# Altium PCB CareBoard_SMD.PcbDoc
Units mil, origin at the board's own origin, x right, y up, seen from the top; angles counter-clockwise.
Board outline 6840 x 2601.5 mil, 2 copper layers (Top Layer, Bottom Layer); 86 components, 76 nets, 332 pads, 108 vias.
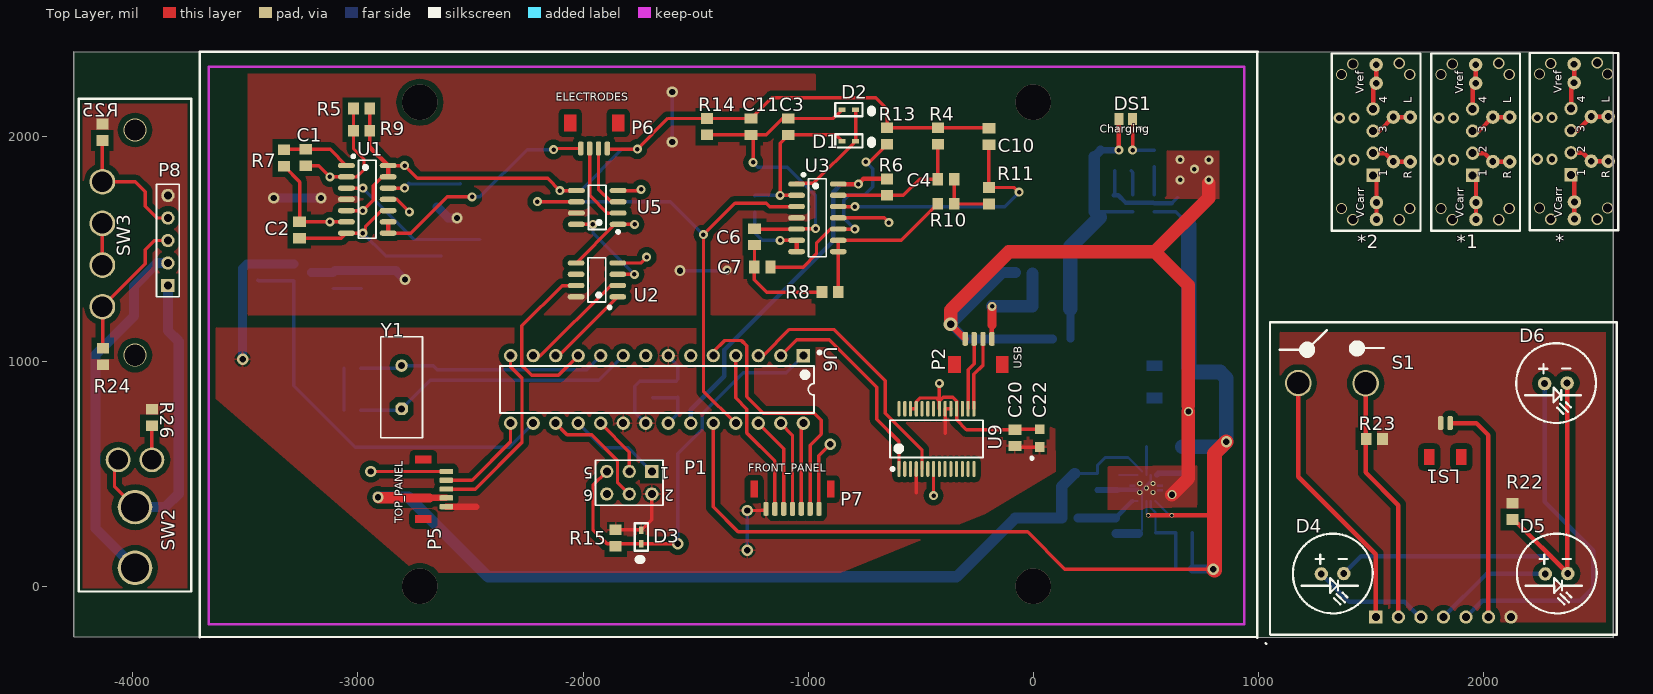
[diagram p0: Top Layer view]
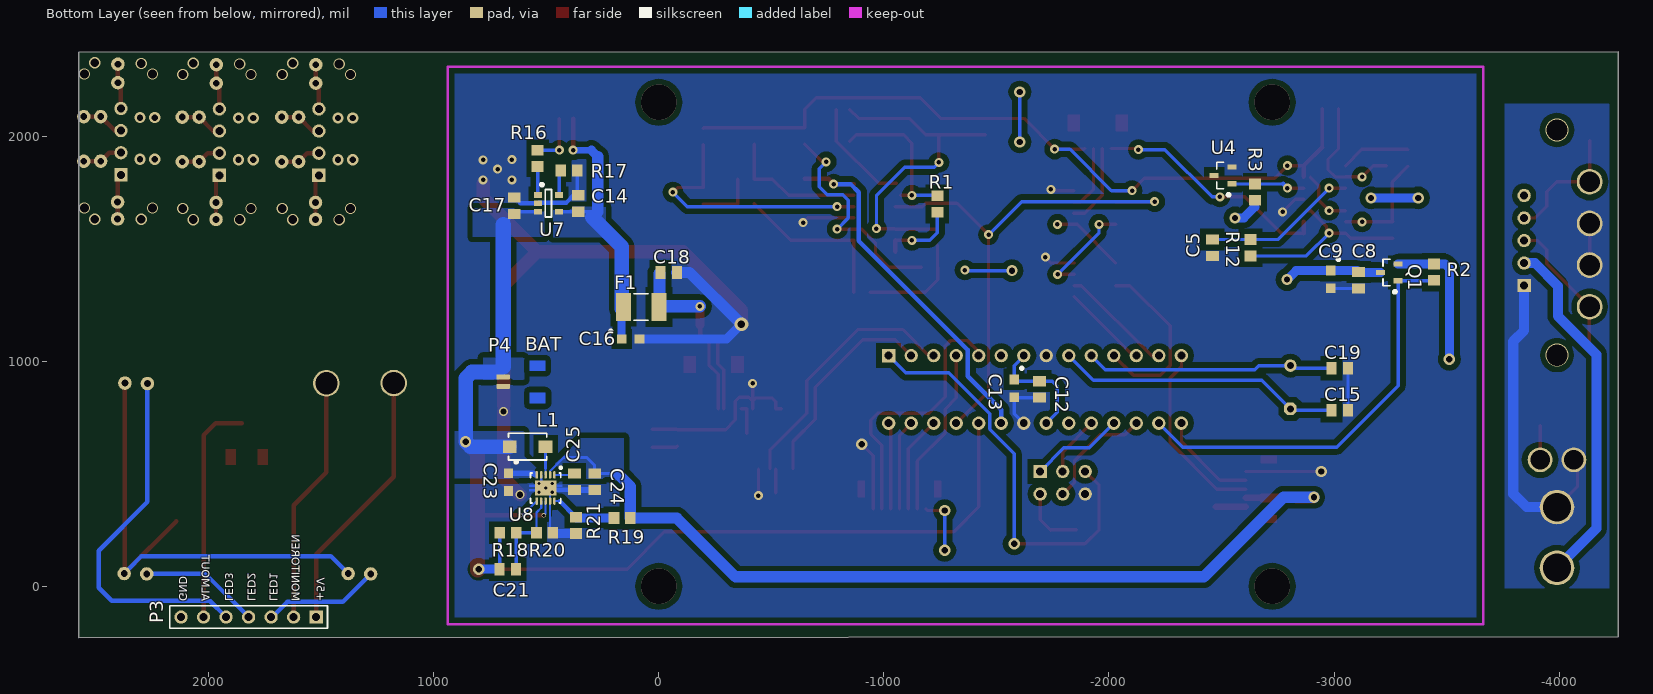
[diagram p1: Bottom Layer view, seen from below]
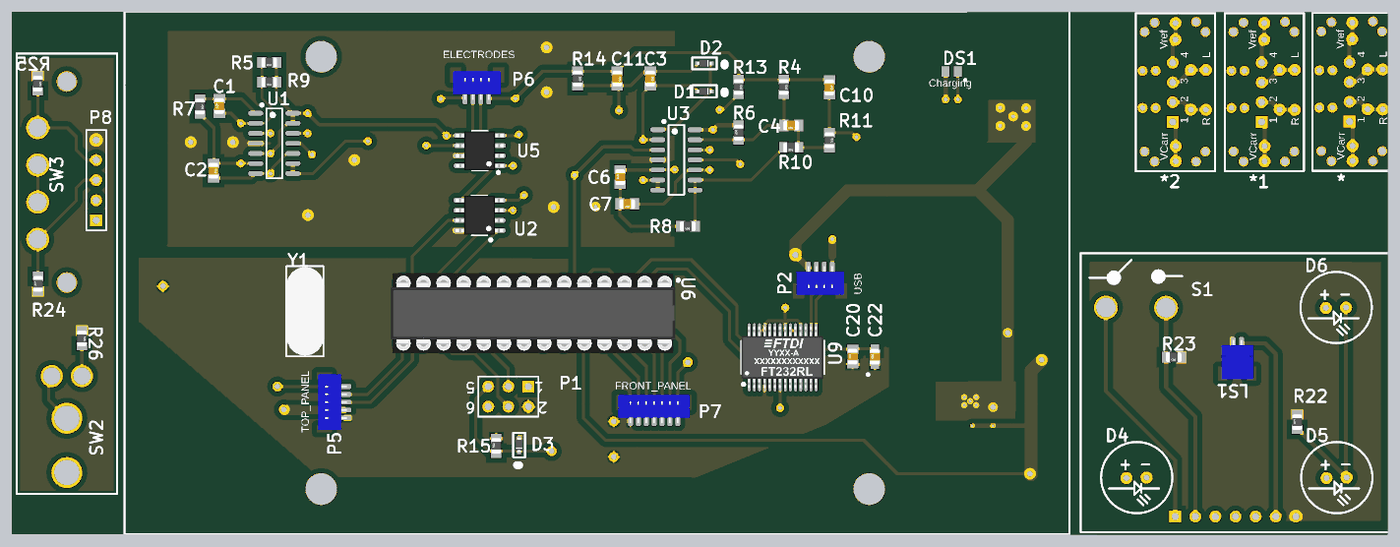
[diagram p2: 3D render of the assembled board from above, using the file's embedded part models]
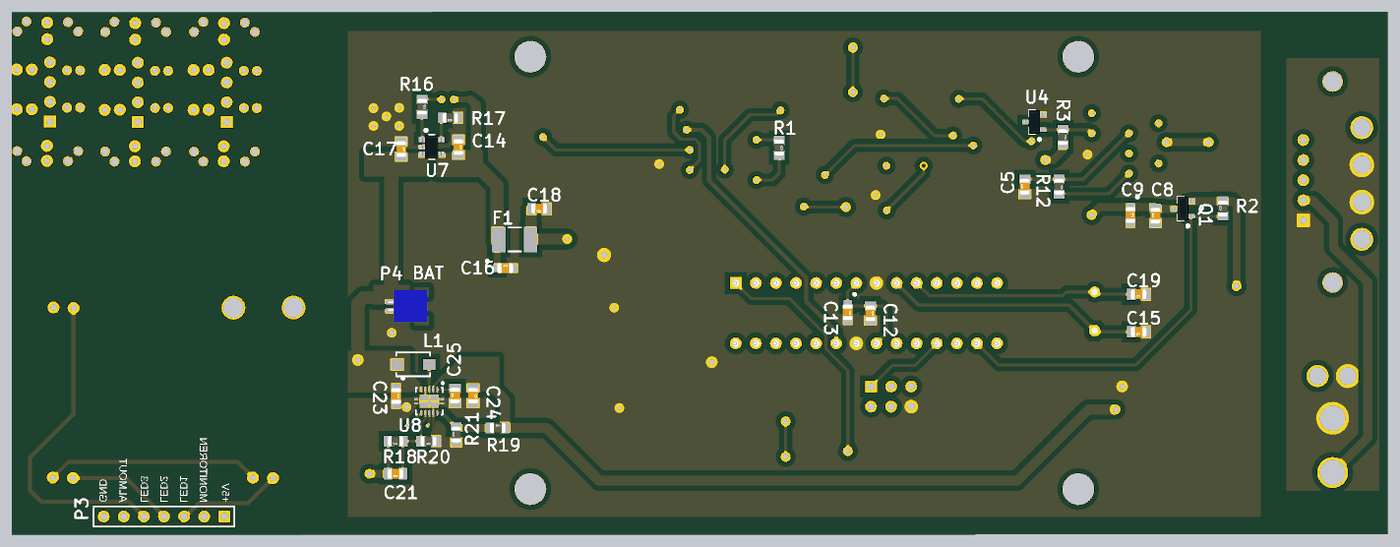
[diagram p3: 3D render of the assembled board from below, using the file's embedded part models]

## Layer stack, top to bottom
Top Layer: signal copper 1.4
Dielectric: dielectric 12.6, FR-4, Dk 4.8
Bottom Layer: signal copper 1.4

## Board outline
-4262.5,-225 2577.5,-227.5 2577.5,2371.5 -4262.5,2374

## Design rules (kind name [scope] priority, off if disabled: settings)
Clearance "Polygon Clearance" [All vs InPolygon] p1: gap=25 // Distance between polygons and different nets
Clearance [All] p2: gap=5 // Trace/Space
ComponentClearance [All] p1: gap=20 collisioncheckmode=3 verticalgap=20 showdistances=TRUE
FanoutControl Fanout_Default [All] p5: bgadir=Out bgaviamode=Centered fanoutstyle=Auto fanoutdirection=OutOnly viagrid=1 // Fanout_Default (Default Rule)
HoleSize [All] p1: absolutevalues=TRUE maxlimit=160 minlimit=15 maxpercent=80.000 minpercent=20.000
MinimumAnnularRing [All] p1: minimumring=8
MinimumSolderMaskSliver [All] p1: minsoldermaskwidth=1
PolygonConnect PolygonConnect_1 [All vs IsNamedPolygon('+5V')] p1: connectstyle=Relief reliefconductorwidth=10 reliefentries=4 polygonreliefangle="90 Angle" airgapwidth=10
PolygonConnect [All] p2: connectstyle=Direct reliefconductorwidth=10 reliefentries=4 polygonreliefangle="90 Angle" airgapwidth=10
RoutingVias [All] p1: holewidth=20 width=40 viastyle="Through Hole" minholewidth=15 minwidth=35 maxholewidth=30 maxwidth=50
SilkToSilkClearance [All] p1: silktosilkclearance=1
SilkToSolderMaskClearance SilkscreenOverComponentPads [IsPad] p1: minsilkscreentomaskgap=1 clearancetoexposedcopper=TRUE
SolderMaskExpansion [All] p1: expansion=4
Width [All] p1: maxlimit=250 minlimit=7 preferedwidth=15
22 further rules are at their usual default settings.

## Classes and differential pairs
component class CaRe_Schematic_SMD_FRONT_PANEL: D4 D5 D6 LS1 P3 R22 R23 S1
component class CaRe_Schematic_SMD_TOP_PANEL: P8 R24 R25 R26 SW2 SW3

## Components (designator, comment, footprint, x,y, rotation, side; value= is the part's Value field where it differs from the comment)
* "GARMENT_CONNECTOR" GARMENT_DIN 2599,1582.1 r90 top
*1 "GARMENT_CONNECTOR" GARMENT_DIN 2161.7,1580 r90 top (schematic designator *)
*2 "GARMENT_CONNECTOR" GARMENT_DIN 1719.7,1580 r90 top (schematic designator *)
C1 "SockCap" CAP0805 -3231.31,1905 r90 top
C2 "SockCap" CAP0805 -3260,1583 r270 top
C3 "SockCap" CAP0805 -1088,2041.9 r270 top
C4 "SockCap" CAP0805 -387.69,1808 r180 top
C5 "SockCap" CAP0805 -2459,1504 r90 bottom
C6 "SockCap" CAP0805 -1238,1552 r90 top
C7 "SockCap" CAP0805 -1203.21,1418 r180 top
C8 "SockCap" CAP0805 -3108.6,1359.68 r90 bottom
C9 "SockCapPol" 0805TANTCAP -2985,1363.13 r270 bottom
C10 "SockCap" CAP0805 -197,1998 r270 top
C11 "SockCap" CAP0805 -1253,2041.9 r270 top
C12 "SockCap" CAP0805 -1691,874.76 r270 bottom
C13 "SockCapPol" 0805TANTCAP -1578.51,879.68 r270 bottom
C14 "4.7uF" CAP0805 357.85,1700.42 r270 bottom
C15 "SockCap" CAP0805 -3025,782.23 r0 bottom
C16 "10uF" 0805TANTCAP 125,1099 r180 bottom
C17 "4.7uF" CAP0805 642,1691 r270 bottom
C18 "100nF" CAP0805 -44,1394.13 r0 bottom
C19 "SockCap" CAP0805 -3025,968.6 r0 bottom
C20 "SockCap" CAP0805 -81.69,659.31 r90 top
C21 "100nF" CAP0805 670.58,76 r0 bottom
C22 "SockCapPol" 0805TANTCAP 28.31,658 r90 top
C23 "10uF" 0805TANTCAP 667.58,463 r270 bottom
C24 "22uF" CAP0805 284.58,464.58 r270 bottom
C25 "100nF" CAP0805 374.58,465 r90 bottom
D1 "BAT42W" SOD-523 -819,1977.9 r180 top
D2 "BAT42W" SOD-523 -819,2116.9 r180 top
D3 "BAT42W" SOD-523 -1741,219 r90 top
D4 "STATUS" 10MMLED 1279.5,54.92 r0 top
D5 "CARDIAC" 10MMLED 2274.5,54.92 r0 top
D6 "RESPIRATORY" 10MMLED 2271.5,900.92 r0 top
DS1 "CHIPLED_RED" CHIP_LED0805 411,2076.59 r180 top
F1 "MF-MSMF050-1" "MF-MSMF050 FOOTPRINT" 78,1241 r0 bottom
L1 "4.7uH" INDP4330X10N 582.58,620 r180 bottom
LS1 "ALARM" "JST-2 PIN SMD CONNECTOR" 1910,741.42 r180 top
P1 "ICSP" HDR2X3 -1694.3,510 r180 top
P2 "USB" "JST 4-PIN SMD" -124.89,1108.17 r180 top
P3 "Front Panel Connections" HDR1X7 1522,-136.58 r0 bottom
P4 "BAT" "JST-2 PIN SMD CONNECTOR" 707,988 r270 bottom
P5 "TOP_PANEL" "JST 5 PIN SMD" -2597,294 r90 top
P6 "ELECTRODES" "JST 4-PIN SMD" -2069,1936 r0 top
P7 "FRONT_PANEL" "JST-SH 7-PIN VERTICAL SMD" -1247,319 r0 top
P8 "Header 5" HDR1X5 -3844,1336 r90 top
Q1 "BSP304" SOT23_L -3245,1394.13 r0 bottom
R1 "SockRes" RES0805 -1237.69,1697.9 r270 bottom
R2 "SockRes" RES0805 -3444,1395.5 r90 bottom
R3 "SockRes" RES0805 -2648.31,1751 r270 bottom
R4 "SockRes" RES0805 -423.98,2000 r270 top
R5 "SockRes" RES0805 -2983.31,2121.71 r180 top
R6 "SockRes" RES0805 -649,1773 r90 top
R7 "SockRes" RES0805 -3328,1902.46 r270 top
R8 "SockRes" RES0805 -902,1307 r180 top
R9 "SockRes" RES0805 -2983.31,2023.69 r180 top
R10 "SockRes" RES0805 -387.69,1699.42 r180 top
R11 "SockRes" RES0805 -197,1735 r270 top
R12 "SockRes" RES0805 -2629,1504 r270 bottom
R13 "SockRes" RES0805 -649,2000 r270 top
R14 "SockRes" RES0805 -1450,2041.9 r270 top
R15 "1K" RES0805 -1855,215 r90 top
R16 "330" RES0805 538,1901.22 r270 bottom
R17 "2K" RES0805 398.27,1846.32 r0 bottom
R18 "2M" RES0805 669.58,238 r0 bottom
R19 "2M" RES0805 162.58,304 r180 bottom
R20 "220K" RES0805 506.58,238 r0 bottom
R21 "220K" RES0805 368.58,271 r90 bottom
R22 "Resistor" RES0805 2129,333.42 r90 top
R23 "Resistor" RES0805 1515,655.42 r180 top
R24 "Resistor" RES0805 -4133,1021 r90 top
R25 "Resistor" RES0805 -4135,2017 r270 top
R26 "Resistor" RES0805 -3915,750 r270 top
S1 "ENABLE" SPST 1177.5,902.92 r0 top
SW2 "On/Off Rocker Swith" POWER_SWITCH -3990,82 r90 top
SW3 "Slider Switch" SLIDER -3990,1027 r90 top
U1 "TLV274IN" TI-D14_L -2958.31,1719 r0 top
U2 "XXXXX" SOIC-8 -1938,1361 r180 top
U3 "TLV274IN" TI-D14_L -958.69,1636.9 r0 top
U4 "LM4040" SOT23_L -2506.31,1825 r0 bottom
U5 "LT1920" LT-S8-8_L(LT1920) -1936.69,1683 r180 top
U6 "ATmega328P-PU" 28P3 -1671.32,874.76 r270 top
U7 "MCP73831T-2ADI/OT" SOT-23-OT5_L 490,1701.32 r180 bottom
U8 "TPS61200DRCT" DRC10-2400X1650TP 502.58,437 r270 bottom
U9 "FT232RL-Reel" SSOP-28_L(FTDI) -430,655 r90 top
Y1 "ECS-10-3-1" HC-49U -2806,884.23 r90 top

## Footprints (in the part's own frame and the unit in brackets; to place one, negate y for a bottom-side part, rotate by r counter-clockwise, add the part's x,y. Pads: shape width x height; smd on the part's side, far side on the other; paste and mask are expansions set on the pad)
10MMLED [mil]
  round 60 hole 30: 1(0,0) 2(100,2)
  silkscreen extent -126,-175 228,179
28P3 [mm] "DIP, 28-Leads, Row Spacing 7.62mm, Pitch 2.54mm, Body 34.67x7.3mm"
  rect 1.5x1.5 hole 0.9: 1(-3.81,16.51)
  round 1.5 hole 0.9: 2(-3.81,13.97) 3(-3.81,11.43) 4(-3.81,8.89) 5(-3.81,6.35) 6(-3.81,3.81) 7(-3.81,1.27) 8(-3.81,-1.27) 9(-3.81,-3.81) 10(-3.81,-6.35) 11(-3.81,-8.89) 12(-3.81,-11.43) 13(-3.81,-13.97) 14(-3.81,-16.51) 15(3.81,-16.51) 16(3.81,-13.97) 17(3.81,-11.43) 18(3.81,-8.89) 19(3.81,-6.35) 20(3.81,-3.81) 21(3.81,-1.27) 22(3.81,1.27) 23(3.81,3.81) 24(3.81,6.35) 25(3.81,8.89) 26(3.81,11.43) 27(3.81,13.97) 28(3.81,16.51)
  silkscreen extent -4.29,-17.7 2.65,18.46, body extent -5.05,-18 5.05,18, height 8.89
0805TANTCAP [mm] "0805 TANTALUM CAPACITOR MOLDED"
  rect 1.1x1.05 smd: 1(-1,0) 2(1,0)
  silkscreen extent -2.36,0.76 -2.16,0.96, body extent -1,-0.62 1,0.63, height 0.78
CAP0805 [mm] "Chip Capacitor 0805 Package"
  rect 1.15x1.45 smd: 1(-0.925,0) 2(0.925,0)
  body extent -1,-0.62 1,0.63, height 0.78
CHIP_LED0805 [mm] "LED 0805"
  rect 1x1.35 smd: 1(-0.775,0) 2(0.775,0)
  silkscreen extent -1.75,1.02 -1.65,1.12, body extent -1.07,-0.7 1.07,0.7, height 1.1
DRC10-2400X1650TP [mm] "SON, 10-Leads, Body 3x3mm, Pitch 0.5mm, Thermal Pad 2.4x1.65mm, TI Recommended"
  oval 0.85x0.28 smd paste-0.025 mask+0.07: 1(-1.475,1) 2(-1.475,0.5) 3(-1.475,0) 4(-1.475,-0.5) 5(-1.475,-1) 6(1.475,-1) 7(1.475,-0.5) 8(1.475,0) 9(1.475,0.5) 10(1.475,1)
  rect 1.65x2.4 smd paste-0.825 mask+0.07: 11(0,0)
  Top Layer region: -0.39,-1.2 -0.11,-1.2 -0.11,-1.9 -0.39,-1.9
  Top Layer region: 0.39,-1.9 0.11,-1.9 0.11,-1.2 0.39,-1.2
  Top Layer region: 0.39,1.2 0.11,1.2 0.11,1.9 0.39,1.9
  Top Layer region: -0.39,1.9 -0.11,1.9 -0.11,1.2 -0.39,1.2
  silkscreen extent -2.34,-1.7 1.7,1.75, body extent -1.55,-1.55 1.55,1.55, height 1
GARMENT_DIN [mil]
  rect 59.06x59.06 hole 35.43: 1(245.93,210)
  round 59.06 hole 35.43: 2(344.13,210) 3(442.33,210) 4(540.53,210)
  round 60 hole 30: 6(50,195) 6(306.03,45) 6(504.37,45) 6(737.4,196.5) 7(125,195) 7(306.67,120) 7(504.37,120) 7(655,196.5)
  Top Layer lines w19.68: 140,210 125,195 ; 344.13,210 344.13,157.46 306.03,119.37 306.03,45 ; 442.33,210 442.33,182.04 504.37,120 504.37,45 ; 540.53,210 641.5,210 655,196.5 737.4,196.5 ; 50,195 125,195 ; 230.93,195 125,195
  silkscreen extent 0,0 787,394
HC-49U [mm] "Quartz Crystal, Thru-Hole; 2 Leads; Body 11.35 x 4.65 x 13.46 mm (LxWxH max)"
  oct 1.4x1.4 hole 0.8: 1(-2.44,0)
  round 1.4 hole 0.8: 2(2.44,0)
  silkscreen extent -5.7,-2.35 5.7,2.35, body extent -5.59,-2.36 5.58,2.31, height 13.49
HDR1X5 [mm] "Connector; Header; 5 Position"
  rect 1.5x1.5 hole 0.9: 1(0,0)
  round 1.5 hole 0.9: 2(2.54,0) 3(5.08,0) 4(7.62,0) 5(10.16,0)
  silkscreen extent -1.27,-1.27 11.43,1.27
HDR1X7 [mm] "Connector; Header; 7 Position"
  rect 1.5x1.5 hole 0.9: 1(0,0)
  round 1.5 hole 0.9: 2(2.54,0) 3(5.08,0) 4(7.62,0) 5(10.16,0) 6(12.7,0) 7(15.24,0)
  silkscreen extent -1.27,-1.27 16.51,1.27
HDR2X3 [mm] "Connector; Header; 3x2 Position"
  rect 1.5x1.5 hole 0.9: 1(0,0)
  round 1.5 hole 0.9: 2(0,2.54) 3(2.54,0) 4(2.54,2.54) 5(5.08,0) 6(5.08,2.54)
  silkscreen extent -1.27,-1.27 6.35,3.81
INDP4330X10N [mm] "Precision Wire Wound Inductor, 2-Leads, Body 4.30x3.00mm, IPC Medium Density"
  rect 1.55x1.4 smd: 1(-2.025,0) 2(2.025,0)
  silkscreen extent -2.15,-1.5 2.15,1.52
"JST 4-PIN SMD" [mm] "BM04B-SRSS-TB"
  rrect50% 0.6x1.55 smd: 1(1.499,0.229) 2(2.498,0.229) 3(3.497,0.229) 4(4.496,0.229)
  Top Layer region: -0.406,2.134 1.016,2.134 1.016,4.089 -0.406,4.089
  Top Layer region: 5.004,2.134 6.426,2.134 6.426,4.089 5.004,4.089
  body extent 0,0 6,3.6, height 4.25
"JST 5 PIN SMD" [mil] "BM05B-SRSS-TB"
  rrect50% 23.62x61.02 smd: 1(60,10) 2(99,10) 3(138,10) 4(177,10) 5(216,10)
  Top Layer region: 252,75 287,75 287,150 252,150
  Top Layer region: -12,75 23,75 23,150 -12,150
  body extent 0,0 276,142
"JST-2 PIN SMD CONNECTOR" [mm] "SM02B-SRSS-TB"
  rrect50% 0.6x1.55 smd: 1(1.473,0.406) 2(2.54,0.406)
  Top Layer region: -0.381,3.356 0.819,3.356 0.819,5.156 -0.381,5.156
  Top Layer region: 3.245,3.356 4.445,3.356 4.445,5.156 3.245,5.156
  body extent 0,0 4,4.95, height 3.01
"JST-SH 7-PIN VERTICAL SMD" [mm]
  rrect50% 0.6x1.55 smd: 1(1.524,0.635) 2(2.519,0.635) 3(3.514,0.635) 4(4.508,0.635) 5(5.503,0.635) 6(6.498,0.635) 7(7.493,0.635)
  Top Layer region: -0.254,1.905 0.635,1.905 0.635,3.81 -0.254,3.81
  Top Layer region: 8.382,1.905 9.271,1.905 9.271,3.81 8.382,3.81
  body extent 0,0.21 9,3.81, height 4.25
LT-S8-8_L(LT1920) [mm] "SOIC, 8-Leads, Body 4.9x3.9mm, Pitch 1.27mm, IPC High Density"
  oval 1.9x0.6 smd: 1(-2.35,1.905) 2(-2.35,0.635) 3(-2.35,-0.635) 4(-2.35,-1.905) 5(2.35,-1.905) 6(2.35,-0.635) 7(2.35,0.635) 8(2.35,1.905)
  silkscreen extent -2.48,-2.5 1,2.88, body extent -3,-2.45 3,2.45, height 1.75
"MF-MSMF050 FOOTPRINT" [mm] "PTC FUSE"
  rect 1.7x3.2 smd: 1(-2,0) 2(2,0)
  silkscreen extent -0.8,-1.5 0.8,1.5, body extent -2.37,-1.71 2.36,1.71, height 0.85
POWER_SWITCH [mm] "SPST Rocker w/ LED"
  round 3.9 hole 3.2: 1(0,0) 2(6.858,0)
  round 2.8 hole 2.2: 3(12.192,1.905) 4(12.192,-1.905)
RES0805 [mm] "Chip Resistor, 2-Leads, Body 2.00x1.25mm, IPC Medium Density"
  rect 1.2x1.35 smd: 1(-0.925,0) 2(0.925,0)
  body extent -1,-0.62 1,0.63, height 0.78
SLIDER [mm]
  round 2.9 hole 2.3 unplated: 1(5.461,3.683) 2(10.16,3.683) 3(14.859,3.683) 4(19.558,3.683)
SOD-523 [mm]
  rect 0.8x0.5 smd: 1(-0.762,0) 2(0.762,0)
  silkscreen extent -2.54,-0.76 1.55,0.74, body extent -0.91,-0.42 0.91,0.42, height 0.71
SOIC-8 [mm] "SOIC, 8-Leads, Body 4.9x3.9mm, Pitch 1.27mm, IPC High Density"
  oval 1.9x0.6 smd: 1(-2.35,1.905) 2(-2.35,0.635) 3(-2.35,-0.635) 4(-2.35,-1.905) 5(2.35,-1.905) 6(2.35,-0.635) 7(2.35,0.635) 8(2.35,1.905)
  silkscreen extent -1.55,-2.5 1,3.22, body extent -3,-2.45 3,2.45, height 1.75
SOT23_L [mm] "SOT23, 3-Leads, Body 2.9x1.3mm, Pitch 0.95mm, Lead Span 2.3mm, IPC High Density"
  rect 1x0.6 smd: 1(-1,0.95) 2(-1,-0.95) 3(1,0)
  silkscreen extent -0.76,-1.5 0.7,2.31, body extent -1.27,-1.52 1.27,1.48, height 1.1
SOT-23-OT5_L [mm] "SOT23, 5-Leads, Body 2.9x1.6mm, Pitch 0.95mm, Lead Span 2.7mm, IPC High Density"
  rect 0.9x0.65 smd: 1(-1.2,0.95) 2(-1.2,0) 3(-1.2,-0.95) 4(1.2,-0.95) 5(1.2,0.95)
  silkscreen extent -0.86,-1.55 0.35,2.23, body extent -1.53,-1.5 1.53,1.5, height 1.45
SPST [mm] "Momentary Enable Button"
  round 3 hole 2.5: 1(0,0) 2(7.595,-0.025)
  silkscreen extent -2.08,3.35 9.63,5.99
SSOP-28_L(FTDI) [mm] "SOP, 28-Leads, Body 10.2x5.3mm, Pitch 0.65mm, IPC High Density"
  oval 1.8x0.35 smd: 1(-3.4,4.225) 2(-3.4,3.575) 3(-3.4,2.925) 4(-3.4,2.275) 5(-3.4,1.625) 6(-3.4,0.975) 7(-3.4,0.325) 8(-3.4,-0.325) 9(-3.4,-0.975) 10(-3.4,-1.625) 11(-3.4,-2.275) 12(-3.4,-2.925) 13(-3.4,-3.575) 14(-3.4,-4.225) 15(3.4,-4.225) 16(3.4,-3.575) 17(3.4,-2.925) 18(3.4,-2.275) 19(3.4,-1.625) 20(3.4,-0.975) 21(3.4,-0.325) 22(3.4,0.325) 23(3.4,0.975) 24(3.4,1.625) 25(3.4,2.275) 26(3.4,2.925) 27(3.4,3.575) 28(3.4,4.225)
  silkscreen extent -3.52,-5.25 2.1,5.25, body extent -3.88,-5.12 3.88,5.21, height 2.16
TI-D14_L [mm] "SOIC, 14-Leads, Body 8.65x3.9mm, Pitch 1.27mm, IPC High Density"
  oval 1.9x0.6 smd: 1(-2.35,3.81) 2(-2.35,2.54) 3(-2.35,1.27) 4(-2.35,0) 5(-2.35,-1.27) 6(-2.35,-2.54) 7(-2.35,-3.81) 8(2.35,-3.81) 9(2.35,-2.54) 10(2.35,-1.27) 11(2.35,0) 12(2.35,1.27) 13(2.35,2.54) 14(2.35,3.81)
  silkscreen extent -1.7,-4.4 1,4.98, body extent -2,-4.38 2,4.38, height 1.75

## Part data
C1 C2 C3 C4 C5 C6 C7 C8 C10 C11 C12 C15 C19 C20: "Capacitor"
C9 C13 C22: "Polarized Capacitor (Axial)"
C14 C17 C18 C21 C24 C25: library part "Chip Cap", "Capacitor"
C16 C23: library part "Cap Tant", "Polarized Capacitor (Radial)"
D1 D2 D3: "Schottky Diode"
D4 D5 D6: library part LED0, "10 mm LED"
DS1: "Typical RED LED"
F1: library part "PTC Fuse", "PTC Resettable Fuse 500 mA"
L1: library part Inductor, "Inductor"
LS1: library part Speaker, "Loudspeaker"
P1: library part "Header 3X2", "Header, 3-Pin, Dual row"
P2 P6: library part "Header 4", "Header, 4-Pin"
P3 P7: library part "Header 7", "Header, 7-Pin"
P4: library part "Header 2", "Header, 2-Pin"
P5: library part "Header 5", "Header, 5-Pin"
P8: "Header, 5-Pin"
Q1: "P-channel Enhancement Mode Vertical D-MOSFET"
R1 R2 R3 R4 R5 R6 R7 R8 R9 R10 R11 R12 R13 R14: "Resistor"
R15 R16 R17 R18 R19 R20 R21: library part "Chip Res", "Resistor"
R22 R23 R24 R25 R26: library part "Chip Res"
S1: library part SW-SPST, "Single-Pole, Single-Throw Switch"
SW2: library part "ON/OFF Rocker"
SW3: library part SLIDER
U1 U3: "JFET-Input Operational Amplifier"
U2: library part DS1804-050, "Nonvolatile Trimmer Potentiometer"
U4: "Precision Micropower Shunt Voltage Reference, 0.1% accuracy, 2.5 V, 15 ppm / degC, 15 mA, -40 to 85 degC, 3-pin SOT-23 (DBZ), Green (RoHS & no Sb/Br)"
U5: library part AD620AN, "Low-Cost, Low-Power Instrumentation Amplifier"
U6: "8-bit AVR Microcontroller, 32KB Flash, 1KB EEPROM, 2KB SRAM, 28-pin PDIP, Industrial Grade (-40°C to 85°C)"
U7: "Miniature Single-Cell, Fully Integrated Li-Ion, Li-Polymer Charge Management Controller, 4.2V, 5-Pin SOT-23, Industrial Temperature, Tape and Reel"
U8: "Boost Voltage Converter with 0.3 to 5.5 V Input and 1.8 to 5.5 V Output, -40 to 85 degC, 10-Pin SON (DRC), Green (RoHS & no Sb/Br)"
U9: "USB UART Asynchronous Serial Data Transfer Chip, SSOP-28, Tape and Reel"
Y1: library part ECS-10-13-1, "Crystal Oscillator"

## Via types
v1: diameter 40, hole 20, Top Layer to Bottom Layer, 40 vias
v2: diameter 50, hole 28, Top Layer to Bottom Layer, 28 vias
v3: diameter 50, hole 39.37, Top Layer to Bottom Layer, 24 vias
v4: diameter 22.83, hole 14.96, Top Layer to Bottom Layer, 5 vias
v5: diameter 157/157 (per signal layer), hole 157, Top Layer to Bottom Layer, 4 vias
v6: diameter 40, hole 28, Top Layer to Bottom Layer, 2 vias
v7: diameter 20, hole 15, Top Layer to Bottom Layer, 2 vias
v8: diameter 102.36, hole 94.49, Top Layer to Bottom Layer, 2 vias
v9: diameter 62, hole 32, Top Layer to Bottom Layer, 1 vias

## Nets (pads, with @x,y where several pads share a name; then routed paths per layer and width w, separated by ;. In a path a pad name is that pad's centre, name@x,y a point inside that pad or via, vN(x,y) a via of type N, cw(c..) or ccw(c..) an arc to the next point about the centre after c; other vN are vias at no path point)
+3.3V: U9.17
+5V: C12.1 C13.1 C20.1 C22.1 D3.2 P1.2 P5.1 P7.1 Q1.2 R2.2 R15.2 U6.7 U6.20 U6.21 U9.4 U9.19 U9.20 | length 2179.7
  Top Layer w15: -2476,353 -2475,354 ; R15.2 D3.2@-1743.41,251.41 ; D3.2 -1694.3,295.7 P1.2 ; v2(-1270,336.63) -1194.37,336.63 P7.1 ; -519.57,416 U9.4 ; -391,680 -391.61,680.61 U9.20 U9.19 ; C20.1 -77.42,618.63 C22.1
  Top Layer w30: P5.1 -2475,354
  Bottom Layer w15: Q1.2@-3284.76,1431.92 Q1.2 ; U6.21@-1722,723.91 -1770.76,772.68 -1770.76,888.24 -1747.83,911.17 C12.1 C13.1@-1586.39,911.17 ; U6.7@-1622,1023.91 -1578.51,980.43 C13.1 ; v2(-1270,160.28) v2(-1270,336.63)
  Bottom Layer w40: v2(-3512,1009) -3512,1412 -3492.08,1431.92 R2.2 Q1.2@-3284.76,1431.92
+5V_F: P3.1 S1.1 | length 1182.2
  Top Layer w20: S1.1 1177.5,486.92 1522,142.42 P3.1
+5V_T: P8.1 SW2.2 SW2.3 SW3.2 SW3.3 | length 1602.6
  Top Layer w15: SW3.2 SW3.3 ; SW2.3 -4081,546 -4081,443 SW2.2
  Bottom Layer w45: SW2.2 -3855.12,352 -3796,411.11 -3796,1088 -3844,1136 P8.1
ALMOUT: P7.6 U6.5 | length 1211.4
  Top Layer w15: U6.5@-1422,1023.91 -1422,1041 -1371,1092 -1296,1092 -1272,1068 -1272,843 -1198.58,769.58 -973.58,769.58 -941.58,737.58 -941.58,676.4 -991.17,626.81 P7.6
ALMOUT_F: LS1.1 P3.6 | length 1000.4
  Top Layer w20: LS1.1 1968,725.42 2022,671.42 P3.6
ATRX: U6.2 U9.1 | length 947.6
  Top Layer w15: U6.2@-1122,1023.91 -1050.91,1095 -906,1095 -695,884 -695,742 -596.34,643.34 U9.1
ATTX: U6.3 U9.5 | length 1166.5
  Top Layer w15: U6.3@-1222,1023.91 -1200.09,1023.91 -1083,1141 -886.42,1141 -658,912.58 -658,769 -493.98,604.98 U9.5
AVCC_CTRL: Q1.1 R2.1 U6.16 | length 1846
  Bottom Layer w15: R2.1 -3441.64,1356.72 Q1.1 -3284.37,890.37 -3012,618 -2327.91,618 U6.16@-2222,723.91
AVS: C8.2 C9.1 Q1.3 R3.2 U1.4 U2.8 U3.4 U5.7 | length 1185.4
  Bottom Layer w15: v2(-1604,1973.94) v2(-1604,2196) ; v2(-1569,1402.5) -1362.39,1402.5 v1(-1360,1404.89)
  Bottom Layer w40: v2(-3374,1725.21) v2(-3164,1725.21) ; Q1.3 -3110.57,1394.13 C8.2 -3102.2,1402.5 C9.1 -2830.72,1402.5 v2(-2790.86,1362.63) ; -2648.31,1685.31 -2599.36,1636.36 v2(-2560,1636.36)
BATSTAT: U6.6
D+: P2.2 U9.15 | length 327.1
  Top Layer w15: U9.15 -263.66,941.34 -223.23,981.77 P2.2
D-: P2.3 U9.16 | length 321.4
  Top Layer w15: U9.16 -289.25,961.75 -262.56,988.44 P2.3
DUR1: P5.3 U6.14 | length 827.2
  Top Layer w15: P5.3 -2479,432 -2271,640 -2271,924 -2322,975 U6.14@-2322,1023.91
DUR1_T: P8.3 R24.2 SW3.1 | length 635.1
  Top Layer w15: R24.2 -4133,1240 SW3.1 -3944,1433 -3944,1496 -3904,1536 P8.3
DUR2: P5.4 U6.15 | length 437.7
  Top Layer w15: P5.4 -2493,471 -2322,642 U6.15@-2322,723.91
DUR2_T: P8.4 R25.2 SW3.4 | length 579.3
  Top Layer w15: R25.2 SW3.4 -3988,1797 -3944,1753 -3944,1688 -3892,1636 P8.4
GAINFBK: U3.3 U5.6 U6.25 | length 2348.2
  Top Layer w15: v1(-2203,1708.68) -2202.32,1708 U5.6 ; U6.25@-1322,723.91 -1465,866.91 v1(-1465,1562) -1325,1702 -1185,1702 -1169.9,1686.9 U3.3
  Bottom Layer w15: v1(-2203,1708.68) -1611.68,1708.68 v1(-1465,1562)
GND: C5.1 C8.1 C9.2 C12.2 C13.2 C14.1 C15.1 C16.2 C17.1 C18.1 C19.1 C20.2 C22.2 C23.2 C24.2 C25.1 P1.6 P2.4 P4.2 P5.5 P7.7 R17.1 R20.1 R21.1 U1.11 U2.4 U3.11 U4.2 U5.4 U6.8 U6.22 U7.2 U8.4 U8.9 U8.11 U9.7 U9.18 U9.21 U9.25 U9.26 | length 7297.7
  Top Layer w15: v2(-2943,510) P5.5 ; U1.11 -2826.55,1719 v1(-2771,1663.45) ; U2.4 -1743,1436 v1(-1717,1462) ; U5.4 v1@-1746.93,1758 ; P7.7 -952,581 v2(-902,631) ; U3.11 -661.9,1636.9 v1(-641,1616) ; U9.26 U9.25 -519.57,819.23 -502.01,836.79 -430.8,836.79 U9.21@-417.2,823.2 ; v1(-442.8,403.2) U9.7 ; U9.21 U9.21@-417.2,823.2 ; v1@-417,902 -417.2,901.8 U9.21@-417.2,823.2 ; C20.2 -296.73,695.73 -340.43,739.43 U9.18 -340.43,822.43 -358,840 -400.41,840 U9.21@-417.2,823.2 ; C20.2@-80.04,697.37 C22.2
  Top Layer w30: v9(-366.89,1164.17) P2.4
  Top Layer w60: v9(-366.89,1164.17) -366.89,1227.11 -108,1486 540,1486 ; v6(616,407.47) 689.27,480.74 v6(689.27,777) ; 689,802 689,1337 540,1486 ; v1@779,1791 779,1725 540,1486
  Bottom Layer w10: C9.2@-2985.5,1323.26 C9.2 ; v4(473.05,417.31) 482.9,407.47 482.9,346.88 R20.1@482.9,250.73 ; U8.11@522.27,466.53 U8.4
  Bottom Layer w15: C8.1 C9.2@-2985.5,1323.26 ; C15.1 C19.1 ; C12.2 -1580.48,838.34 C13.2 -1578.51,767.4 U6.22@-1622,723.91 ; C14.1 361.85,1740.83 R17.1 ; U8.11@461.78,428.58 v4(473.05,417.31) ; U8.11@482.9,427.16 U8.11@522.27,466.53 ; U7.2@533.56,1705 U7.2 ; 615.9,1701.32 C17.1
  Bottom Layer w20: C14.1 378.17,1736.83 410,1705 U7.2@533.56,1705 ; C25.1 U8.11@461.78,428.58 ; U7.2 615.9,1701.32
  Bottom Layer w25: C24.2 C25.1@374.16,428.16
  Bottom Layer w40: v9(-366.89,1164.17) -301.72,1099 C16.2 ; R21.1 R20.1@466.75,234.58
  Bottom Layer w50: v9(-366.89,1164.17) -136.94,1394.13 C18.1
  other v1: -417.1,901.9 -1741.93,1763 652,1806 780.19,1806 716,1853 780.19,1894 652,1896
  other v4: 532.11,417.31 502.58,437 473.05,456.68 532.11,456.68
GND_F: LS1.2 P3.7 R22.2 R23.1
GND_T: P8.5 R24.1 R25.1 R26.1
LED1: P7.3 U6.26 | length 426.9
  Top Layer w15: U6.26@-1222,723.91 -1108.67,610.58 P7.3
LED1_F: D4.1 P3.3 | length 516.6
  Bottom Layer w20: D4.1 1403.97,-69.55 1649.76,-69.55 P3.3@1716.79,-136.58
LED2: P7.4 U6.27 | length 401.7
  Top Layer w15: U6.27@-1122,723.91 -1069.5,671.41 P7.4
LED2_F: D5.1 P3.4 | length 531.8
  Bottom Layer w20: P3.4 2013.5,54.92 D5.1
LED3: P7.5 U6.28 | length 383.4
  Top Layer w15: P7.5 -1030.33,715.58 U6.28@-1022,723.91
LED3_F: D6.1 P3.5 | length 1616.4
  Bottom Layer w20: P3.5 1995,-63.58 2430,-63.58 2488,-5.58 2488,158.42 2271.5,374.92 D6.1
MISO: P1.1 U6.18 | length 416.3
  Bottom Layer w15: U6.18@-2022,723.91 -1913.09,615 -1799.3,615 P1.1
MONITOREN: P7.2 U6.4 | length 752.1
  Top Layer w15: U6.4@-1322,1023.91 -1322,837.5 -1272.11,787.61 -1272.11,681.11 -1147.83,556.83 P7.2
MONITOREN_F: P3.2 R23.2 S1.2 | length 1098.8
  Top Layer w20: S1.2 1476.5,505.92 1622,360.42 P3.2
MOSI: P1.4 U6.17 | length 514.1
  Top Layer w15: U6.17@-2122,723.91 -2071.09,673 -1961,673 -1847,559 -1847,462.7 P1.4
NetC1_1: C1.1 R5.2 R9.2 U1.2 | length 582.2
  Top Layer w13: U1.2 -3004.59,1819 -2973.25,1850.34 -2973.25,1897.25 -3019.73,1943.73 R9.2 R5.2
  Top Layer w15: C1.1 -3173.82,1868.58 v1(-3124.24,1819) U1.2
NetC1_2: C1.2 R7.1 U1.1 | length 308.2
  Top Layer w15: R7.1 -3325.46,1941.42 C1.2 -3123.25,1941.42 U1.1
NetC2_1: C2.1 R7.2 U1.6 | length 485.8
  Top Layer w15: R7.2 -3258,1796.05 -3258,1621.42 C2.1 -3124.65,1619.42 v1(-3124.24,1619) U1.6
NetC2_2: C2.2 R12.2 U1.7 U1.10 | length 835
  Top Layer w15: C2.2 -3073.25,1546.58 U1.7 v1(-2977.43,1569) -2966,1580.43 -2966,1599.76 -2896.76,1669 U1.10@-2877.43,1669
  Bottom Layer w15: v1(-2977.43,1569) -2876.02,1467.58 R12.2
NetC3_1: C3.1 C6.2 C11.2 D2.2 R14.2 U3.5 | length 1530.8
  Top Layer w15: R14.2 C11.2 ; v1(-1244,1882.78) -1244,1996.48 C11.2 ; C6.2 -1236.48,1586.9 U3.5 -1049.1,1589 v1(-967,1589) ; D2.2 -887.58,2078.31 -1113.69,2078.31 -1186.52,2005.48 C11.2
  Bottom Layer w15: v1(-1244,1882.78) -1223.22,1862 -1093.14,1862 -967,1735.86 v1(-967,1589)
NetC3_2: C3.2 D1.2 R1.1 U3.2 | length 699.2
  Top Layer w15: U3.2@-1073.69,1736.9 v1(-1124.61,1736.9) -1124.61,1968.87 C3.2 -876.58,2005.48 D1.2
  Bottom Layer w15: R1.1 -1235.1,1736.9 v1(-1124.61,1736.9)
NetC4_1: C4.1 R10.1 R11.2 | length 263.2
  Top Layer w15: C4.1 R10.1 -350.43,1698.58 R11.2
NetC4_2: C4.2 R4.2 R6.1 U3.13 | length 627.4
  Top Layer w15: U3.13 -865.85,1736.58 R6.1 -576.45,1736.58 -505.03,1808 C4.2 -423.98,1808.12 R4.2
NetC5_2: C5.2 R12.1 U1.3 | length 687.3
  Top Layer w13: U1.3@-3051.42,1768.42 U1.3
  Top Layer w15: U1.3 v1(-2977.43,1769)
  Bottom Layer w15: v1(-2977.43,1769) -2748.85,1540.42 R12.1 C5.2
NetC6_1: C6.1 C7.2 R8.2 | length 477.3
  Top Layer w15: C6.1 -1238,1419.63 C7.2 -1239.63,1362.63 -1183,1306 ; -1182,1307 R8.2
NetC7_1: C7.1 R13.2 U3.10 | length 1026.1
  Top Layer w15: C7.1 -1021.83,1418 -963,1476.83 -963,1525 -901.1,1586.9 U3.10 v1(-792.76,1586.9) ; v1(-744,1886) -726.58,1886 R13.2
  Bottom Layer w15: v1(-792.76,1586.9) -842,1636.13 -842,1716 -818,1740 -748,1740 -713,1775 -713,1855 v1(-744,1886)
NetC10_2: C10.2 R11.1 U3.12 | length 1162.3
  Top Layer w15: U3.12 v1(-792.76,1686.9) ; C10.2 R11.1 -83.62,1771.42 v1(-63,1750.8)
  Bottom Layer w15: v1(-792.76,1686.9) -126.9,1686.9 v1(-63,1750.8)
NetC25_2: C25.2 U8.1 | length 82.3
  Bottom Layer w10: C25.2@380.93,495.07 U8.1
NetD1_1: D1.1 D2.1 U3.1 | length 482.4
  Top Layer w15: U3.1@-1054.69,1790.38 -976.52,1790.38 D1.1 D2.1
NetD4_2: D4.2 D5.2 D6.2 R22.1 | length 2203.6
  Top Layer w20: R22.1@2142.42,289.01 D5.2@2371.5,59.92 ; D6.2 D5.2@2371.5,59.92 ; D5.2 D5.2@2371.5,59.92
  Bottom Layer w20: D4.2 1457,134.42 2298,134.42 D5.2@2355.82,76.6
NetDS1_1: DS1.1 R16.1 | length 235.4
  Top Layer w15: v1(441.51,1937.63) DS1.1
  Bottom Layer w15: v1(441.51,1937.63) R16.1
NetL1_2: L1.2 U8.3 | length 124.7
  Bottom Layer w10: U8.3 502.58,524.72
  Bottom Layer w15: 502.86,525 L1.2
NetR1_2: R1.2 U3.6 U3.7 | length 340.9
  Top Layer w15: v1(-1124.61,1536.9) U3.6
  Top Layer w20: U3.7 U3.6
  Bottom Layer w15: R1.2 -1237.69,1571.37 -1203.21,1536.9 v1(-1124.61,1536.9)
NetR3_1: R3.1 U1.12 U4.1 | length 327.8
  Top Layer w15: U1.12 v1(-2792.39,1769)
  Bottom Layer w15: -2773.98,1787.42 R3.1 -2545.87,1787.42 U4.1
  Bottom Layer w20: v1(-2792.39,1769) -2773.98,1787.42
NetR8_1: R8.1 R10.2 U3.8 U3.9 | length 738.7
  Top Layer w15: -866.17,1363.58 U3.8 U3.9 -586.63,1536.9 R10.2 ; R8.1 -865.58,1363
NetR16_2: R16.2 U7.1 | length 126.4
  Bottom Layer w15: U7.1 538,1739.48 R16.2
NetR17_2: R17.2 U7.5 | length 110.9
  Bottom Layer w15: R17.2 442.75,1838.25 U7.5
NetR19_1: R19.1 R21.2 U8.10 | length 295.2
  Bottom Layer w10: 440.1,378.93 U8.10
  Bottom Layer w13: R21.2@365.17,304 R21.2
  Bottom Layer w20: R21.2 440.1,378.93
  Bottom Layer w40: R19.1 R21.2@365.17,304
NetR26_2: R26.2 SW2.4 | length 151.6
  Top Layer w15: SW2.4 R26.2
POTCS: U2.7 U6.11 | length 795.9
  Top Layer w15: U2.7 -2093,1336 -2272,1157 -2272,981 -2250,959 -2228,937 -2108.91,937 U6.11@-2022,1023.91
POTINC: U2.1 U6.12 | length 385.1
  Top Layer w15: U6.12@-2122,1023.91 -2107.57,1023.91 U2.1
POTU/D: U2.2 U6.13 | length 505.8
  Top Layer w15: U6.13@-2222,1023.91 -2189.35,1023.91 -1877.27,1336 U2.2
RESET: D3.1 P1.5 R15.1 U6.1 | length 1863.7
  Top Layer w15: P1.5 -1955.8,448.49 -1955.8,251.42 -1893.38,189 D3.1 v2(-1579,189)
  Bottom Layer w15: v2(-1579,189) -1579,589.13 -1469.5,698.63 -1469.5,766.5 -1288,948 -1097.91,948 U6.1@-1022,1023.91
RGH: U2.3 U5.8 | length 444.9
  Top Layer w15: U5.8 v1(-1955.8,1608) ; U2.3 v1(-1772.08,1386)
  Bottom Layer w15: v1(-1955.8,1608) -1955.8,1569.72 v1(-1772.08,1386)
RGL: U2.6
RGW: U2.5 U5.1 | length 331
  Top Layer w15: U2.5 -1858.52,1608 U5.1 v1(-1770.76,1608)
SCK: P1.3 U6.19 | length 266.8
  Top Layer w15: U6.19@-1922,723.91 -1794.3,596.21 P1.3
"UVLO 2.6V": C21.1 R18.1 R20.2 U8.7 | length 400.7
  Bottom Layer w10: U8.7 522.27,348.88 543,328.15 R20.2
  Bottom Layer w15: R20.2 R18.1 C21.1@633.16,77
VBAT: C17.2 C21.2 C23.1 L1.1 P4.1 R18.2 U6.24 U7.3 U8.5 U8.6 U8.8 | length 5625.3
  Top Layer w15: U6.24@-1422,723.91 -1422,352.5 -1311.5,242 -25.43,242 140.57,76 v2(800,76)
  Top Layer w20: v7(511.36,314.86) v7(615.41,314.86) ; v7@615.55,315 805,315
  Top Layer w65: v2(800,76) 805,71 805,315 805,589 v2(858,642)
  Bottom Layer w10: U8.8 502.58,323.63 v7(511.36,314.86) ; U8.6 v7@606.02,314.86
  Bottom Layer w15: U7.3 632.66,1663.92 C17.2 691,1605.58 ; C21.2@706,77 R18.2 ; v2(800,76) v2@805,71
  Bottom Layer w25: 548.5,495 555.87,502.37 C23.1
  Bottom Layer w40: C21.2 v2(800,76)
  Bottom Layer w50: 691,977 716,952
  Bottom Layer w65: L1.1 836,620 v2(858,642) 858,924 830,952 716,952
  Bottom Layer w70: 691,977 691,1605.58
VBUS: C14.2 C16.1 DS1.2 F1.2 U7.4 | length 1302.8
  Top Layer w20: v1(380.49,1937.63) DS1.2
  Bottom Layer w15: 271,1657 296,1657 ; 271,1664 C14.2 442.67,1664 U7.4
  Bottom Layer w20: 271,1657 271,1664
  Bottom Layer w30: 299.63,1937.63 v1(380.49,1937.63)
  Bottom Layer w35: C16.1@164.74,1099.63 F1.2@164.74,1234
  Bottom Layer w40: 271,1909 299.63,1937.63
  Bottom Layer w50: 271,1664 271,1909
  Bottom Layer w65: F1.2@164.74,1234 164.74,1507.74 296,1639
VCARRIER: P6.1 U1.8 U1.9 | length 1061.5
  Top Layer w15: U1.8 -2765,1569 -2604,1730 v1(-2492,1730) ; v1(-2131,1940.16) -2126.16,1945 P6.1
  Top Layer w20: U1.8 U1.9
  Bottom Layer w15: v1(-2492,1730) -2458,1730 -2247.84,1940.16 v1(-2131,1940.16)
VCC: C24.1 P5.2 R19.2 U8.2 | length 4189.5
  Top Layer w30: -2682.25,393 P5.2
  Top Layer w40: -2832.75,393 -2682.25,393
  Top Layer w50: v2@-2908,393 -2832.75,393
  Bottom Layer w10: 420.56,573 U8.2@482.9,510.66
  Bottom Layer w13: 183.84,501 C24.1 284.58,537 320.58,573 420.56,573
  Bottom Layer w50: v2(-2910.68,395.68) -2774.68,395.68 -2421,42 -341.6,42 -79.6,304 R19.2 126.17,443.32 183.84,501
VCC_T: P8.2 SW2.1 | length 1587.6
  Bottom Layer w45: SW2.1 -4165,257 -4165,1030 -3994,1201 -3994,1334 -3892,1436 P8.2
VLEFT: P6.3 U5.3 | length 291.2
  Top Layer w15: P6.3 -1931.33,1764.33 -1875,1708 U5.3
VREF: C10.1 C11.1 P6.4 R4.1 R5.1 R9.1 R13.1 R14.1 U1.5 U1.13 U1.14 U5.5 | length 3789.9
  Top Layer w15: U1.5 v1(-2977.43,1669) -2932,1714.43 -2932,1780.43 U1.13@-2895,1817.43 ; -2946.9,1950.1 R9.1 R5.1 ; U1.14 v1(-2792.39,1869) -2735.39,1812 -2156.61,1812 v1(-2102.61,1758) U5.5 ; P6.4 -1889,1942 v1(-1759,1942) -1622.69,2078.31 R14.1 C11.1 -1161.31,2170 -700,2170 -649,2119 R13.1 R4.1 -199,2036.42 C10.1
  Top Layer w20: -2946.9,1950.1 U1.14 U1.13
  Bottom Layer w15: v1(-2102.61,1758) -2011,1758 -1827,1942 v1(-1759,1942)
VRIGHT: P6.2 U5.2 | length 367.4
  Top Layer w15: P6.2 -1970.67,1736.67 -1892,1658 U5.2
VSIG: R6.2 U3.14 U6.23 | length 1642.3
  Top Layer w15: v1(-776.9,1786.9) v1@-776.9,1787.1
  Top Layer w20: U3.14 v1(-776.9,1786.9) ; v1@-776.9,1787.1 -754.58,1809.42 R6.2
  Bottom Layer w20: U6.23@-1522,723.91 -1522,784.09 -1373,933.09 -1373,1050 -889,1534 -889,1750 -852.1,1786.9 v1(-776.9,1786.9)
VUSB: C18.2 F1.1 P2.1 | length 476.9
  Top Layer w20: P2.1 -183.89,1159.11 -183,1160
  Top Layer w40: -183,1160 v1(-183,1243.51)
  Bottom Layer w15: C18.2 C18.2@-3.25,1389.8
  Bottom Layer w55: v1(-183,1243.51) -3.25,1243.51 C18.2@-3.25,1389.8
XTAL1: C15.2 U6.9 Y1.1 | length 1266.7
  Bottom Layer w15: C15.2 -2811.94,782.23 Y1.1 -2679.17,915 -1930.91,915 U6.9@-1822,1023.91
XTAL2: C19.2 U6.10 Y1.2 | length 1104.6
  Bottom Layer w15: C19.2 -2817.69,968.6 Y1.2 -2665.29,980.29 -2647,962 -1983.91,962 U6.10@-1922,1023.91
pads on no net: *1.1 *1.2 *1.3 *1.4 *1.6 *1.7 *2.1 *2.2 *2.3 *2.4 *2.6 *2.7 *.1 *.2 *.3 *.4 *.6 *.7 U4.3 U9.2 U9.3 U9.6 U9.8 U9.9 U9.10 U9.11 U9.12 U9.13 U9.14 U9.22 U9.23 U9.24 U9.27 U9.28
copper on no net:
  other v2: 1359.7,1895 1424.7,1895 1801.7,1895 1866.7,1895 2239,1897.1 2304,1897.1 1359.7,2080 1424.7,2080 1801.7,2080 1866.7,2080 2239,2082.1 2304,2082.1
  other v3: 1419.7,1628.7 1626,1628.7 1861.7,1628.7 2068,1628.7 2299,1630.8 2505.3,1630.8 1369.7,1678.7 1672.3,1678.7 1811.7,1678.7 2114.3,1678.7 2249,1680.8 2551.6,1680.8 1369.7,2273.7 1672.3,2273.7 1811.7,2273.7 2114.3,2273.7 2249,2275.8 2551.6,2275.8 1419.7,2320 1861.7,2320 2299,2322.1 1626,2323.7 2068,2323.7 2505.3,2325.8
  other v5: -2725,0 0,0 -2725,2150 0,2150
  other v8: -3990,1027 -3990,2027

## Polygon pours and split planes (outlines as drawn)
VBAT on Bottom Layer "VBAT" (solid, remove dead copper, pour order 23): 908,687.95 907.24,479.15 764.15,478.85 751.43,478 535.58,478 535.58,494.7 535.96,495.07 535.58,495.44 535.58,517 598.28,578 598.28,688
GND on Bottom Layer "PGND" (solid, remove dead copper, pour order 22): 720.49,449 720.49,373 593.06,375.18 568.14,405 528.17,421.65 439.87,421.65 401.19,396.1 218.58,395.68 218.58,407.15 218.84,407.47 218.84,461 469.37,461 532,460.82 581,457
GND on Bottom Layer "BOARD_GND" (solid, remove dead copper, pour order 29): -3662.5,2302 -3662.5,-212 937.5,-212 937.5,2302
VCC on Bottom Layer "VCC" (solid, remove dead copper, pour order 25): 463.49,545 433.58,570 345.58,658 154.58,658 154.58,472.26 154.84,472 323.58,472 323.58,533.11 324.37,533.9 452.39,533.9
VBAT on Bottom Layer "VBAT" (solid, remove dead copper, pour order 24): 826,1683.37 821.58,1678.95 509,1678.95 509,1554 510,1553 826,1553
VBUS on Bottom Layer "VDD_CHRG" (solid, remove dead copper, pour order 27): 389,1688 397,1680 468,1680 468,1552 469,1551 235,1551 235,1684 233,1686
VBAT on Bottom Layer "BATT_VBAT" (solid, remove dead copper, pour order 28): 779,1016 780,1015 780,917 603,917 598,912 598.28,912.28 598.28,1016
GND on Bottom Layer "BATT_GND" (solid, remove dead copper, pour order 30): 779,733 595.52,733 594,735.65 598.28,743.11 598.28,930 780,930
GND on Bottom Layer "GND_VSS" (solid, remove dead copper, pour order 26): 826,1936.43 826,1722.44 824.77,1719.6 615.9,1701.32 558.9,1685 515,1685 492,1692.68 429,1692.89 389.69,1705 317,1707 315,1742.74 318.48,1879.49 319.26,2012 398,2012 410,2011 411,1917.95 397.22,1879.49 398.27,1821.71 421.1,1766.28 558.9,1766.28 575,1798.03 602.63,1798.03 602.63,1857.77 603.27,1934.83 681.37,1934.83 680.68,1936.43
+5V_T on Bottom Layer "+5V_T" (solid, remove dead copper, pour order 21): -4223,2144 -3760.06,2144 -3759,2142.98 -3759,-9 -4221.94,-9
GND_F on Top Layer "GND_F" (solid, remove dead copper, pour order 18): 1095,1130.42 1095.5,1129.92 1095.5,-158.58 2543,-158.58 2545,-160.58 2544,-159.58 2544,1129.42
+5V on Top Layer "+5V" (solid, remove dead copper, pour order 20): 99,509 -215,320.11 -860,58 -2736,60.12 -3661,858.12 -3662.5,1151 -759,1144.63 -221,808.24 98,701.07
GND on Top Layer "GND" (solid, remove dead copper, pour order 17): 335.21,533.9 331.18,529.87 331.18,339.9 716.9,339.9 718,341 728,340 727,350 728,369 728.58,536.82
AVS on Top Layer "AVS" (solid, remove dead copper, pour order 32): -966,2277 -968.81,1204 -3485,1203 -3492.49,1212.12 -3488.75,1216.68 -3488.75,2280
GND on Top Layer "BATT_GND" (solid, remove dead copper, pour order 31): 826,1934.83 826,1722.44 579.96,1722.44 592,1734.48 592,1936.43
GND_T on Top Layer "GND_T" (solid, remove dead copper, pour order 19): -4222,-9 -4222,2143 -3758,2143 -3758,-9

## Keep-outs
Keep-Out Layer:
  lines w10: -3662.5,-168 937.5,-168 937.5,2308 -3662.5,2308 -3662.5,-168

## Silkscreen, mask and mechanical layers (free items; w line width, h text height)
Top Overlay:
  lines w10: 992,-225 -1473,-225 -2588,-225 -3702,-225 -3703,-226 -3703,37 -3703,616 -3703,1054.94 -3703,2005 -3703,2375 997,2375 ; 995,-228 995,2373 ; 1032,-252.58 1035,-255.58 ; -4240,-23 -3740,-23 -3740,2166 -4240,2166 -4240,-23 ; 1052,-212.58 1052,1173.42 2592,1173.42 2592,-215.08 1054.5,-215.08 1052,-212.58
  text "Charging" at 296,2001 h60
Bottom Overlay:
  text "+5V" at 1533,-66.58 h60 r90
  text "MONITOREN" at 1644,-66.58 h60 r90
  text "LED1" at 1742,-66.58 h60 r90
  text "LED2" at 1840,-66.58 h60 r90
  text "LED3" at 1938,-66.58 h60 r90
  text "ALMOUT" at 2043,-66.58 h60 r90
  text "GND" at 2143,-66.58 h60 r90
Mechanical 2:
  lines w1: -4262.5,-225 -4262.5,2375 2604,2375 2604,-225 -4262.5,-225

## Text inside footprints (layer, text, board x,y; h text height)
*: Top Overlay "VCarr" at 2364,1637.1 h60 r90; Top Overlay "R" at 2574,1812.1 h60 r90; Top Overlay "L" at 2574,2147.1 h60 r90; Top Overlay "Vref" at 2361,2190.1 h60 r90; Top Overlay "1" at 2464.64,1822.1 h60 r90; Top Overlay "2" at 2464.64,1927.1 h60 r90; Top Overlay "3" at 2464,2017.1 h60 r90; Top Overlay "4" at 2464.64,2147.1 h60 r90
*1: Top Overlay "VCarr" at 1926.7,1635 h60 r90; Top Overlay "R" at 2136.7,1810 h60 r90; Top Overlay "L" at 2136.7,2145 h60 r90; Top Overlay "Vref" at 1923.7,2188 h60 r90; Top Overlay "1" at 2027.34,1820 h60 r90; Top Overlay "2" at 2027.34,1925 h60 r90; Top Overlay "3" at 2026.7,2015 h60 r90; Top Overlay "4" at 2027.34,2145 h60 r90
*2: Top Overlay "VCarr" at 1484.7,1635 h60 r90; Top Overlay "R" at 1694.7,1810 h60 r90; Top Overlay "L" at 1694.7,2145 h60 r90; Top Overlay "Vref" at 1481.7,2188 h60 r90; Top Overlay "1" at 1585.34,1820 h60 r90; Top Overlay "2" at 1585.34,1925 h60 r90; Top Overlay "3" at 1584.7,2015 h60 r90; Top Overlay "4" at 1585.34,2145 h60 r90
P1: Top Overlay "1" at -1614.3,530 h50 r180; Top Overlay "2" at -1594.3,430 h50 r180; Top Overlay "5" at -1954.3,530 h50 r180; Top Overlay "6" at -1954.3,430 h50 r180